# Altium PCB AtlasMCU_STM32_PCB.PcbDoc (part 1 of 2)
Units mm, origin at the board's own origin, x right, y up, seen from the top; angles counter-clockwise.
Board outline 53.5 x 39.5 mm, 4 copper layers (Top Layer, Int1 (GND), Int2 (PWR), Bottom Layer), stack 1.591 mm thick; 56 components, 56 nets, 263 pads, 118 vias.
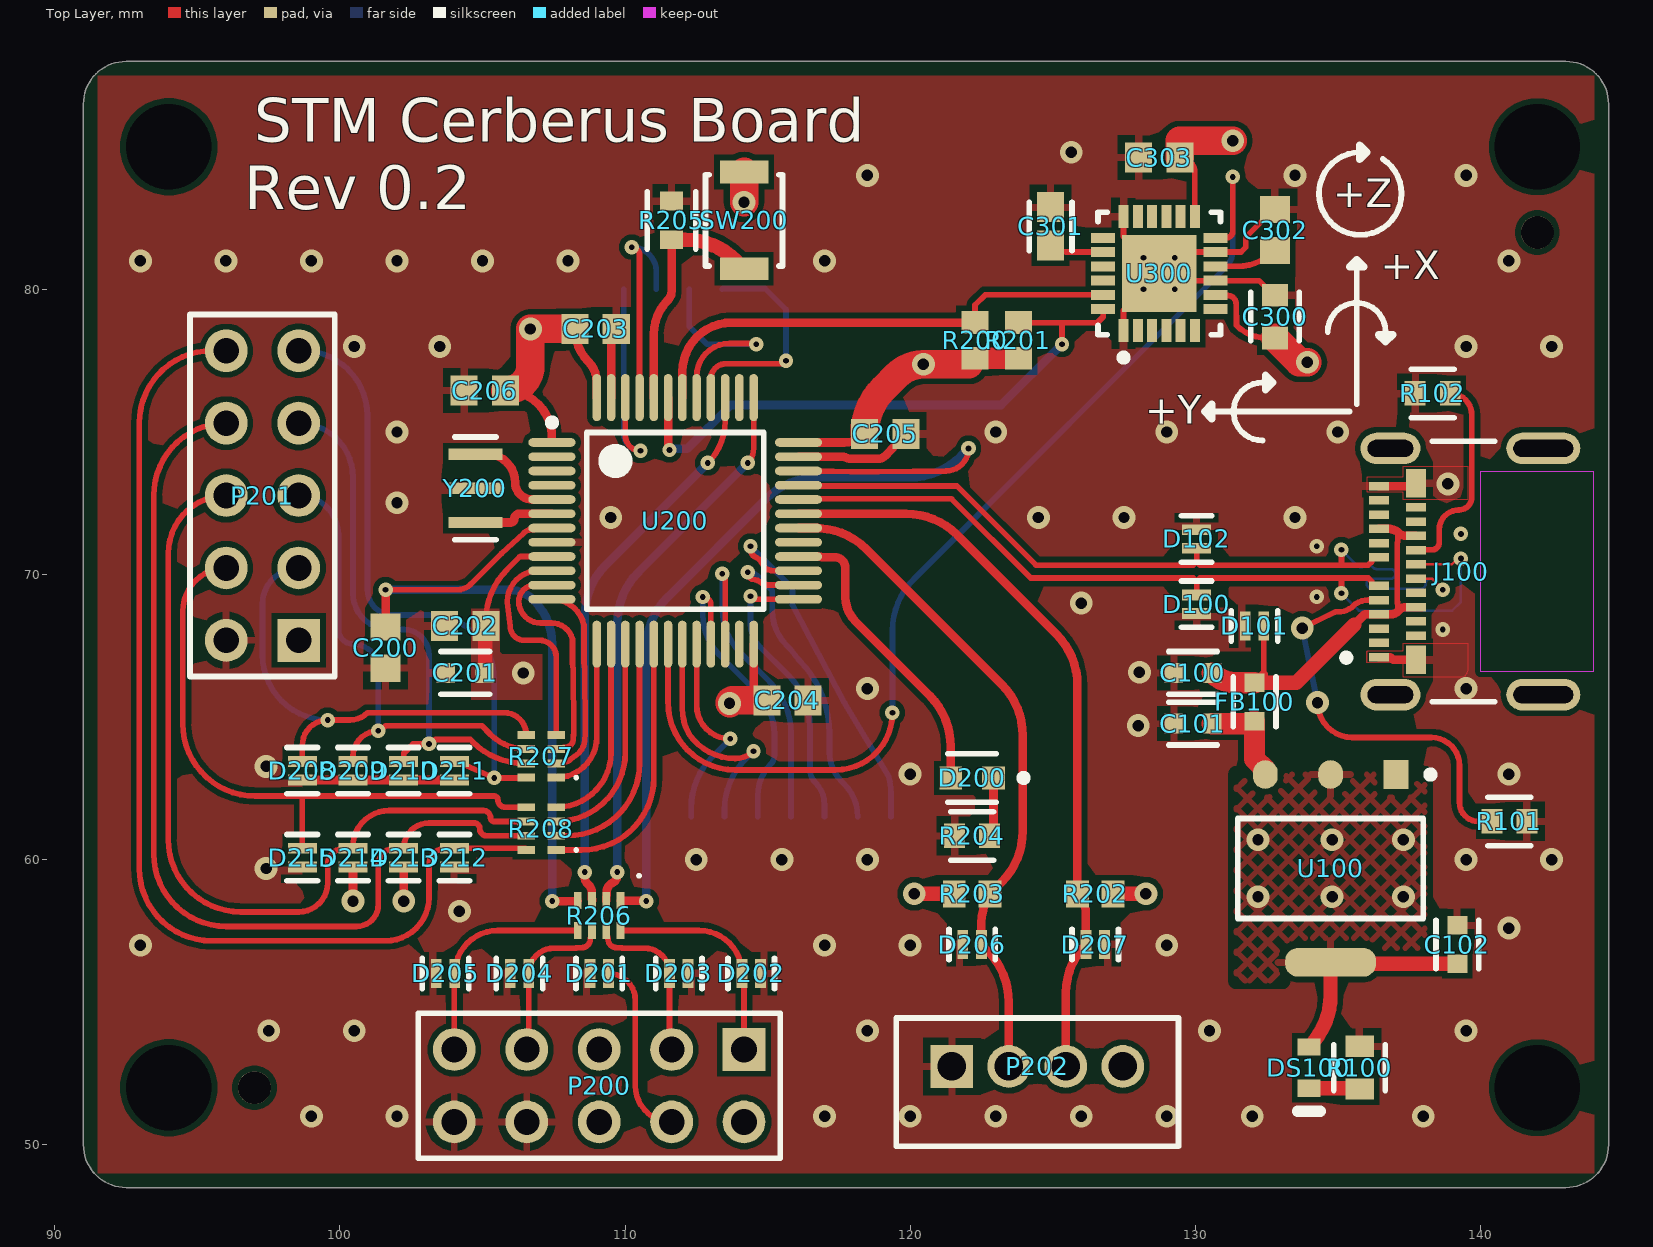
[diagram p0: Top Layer view]
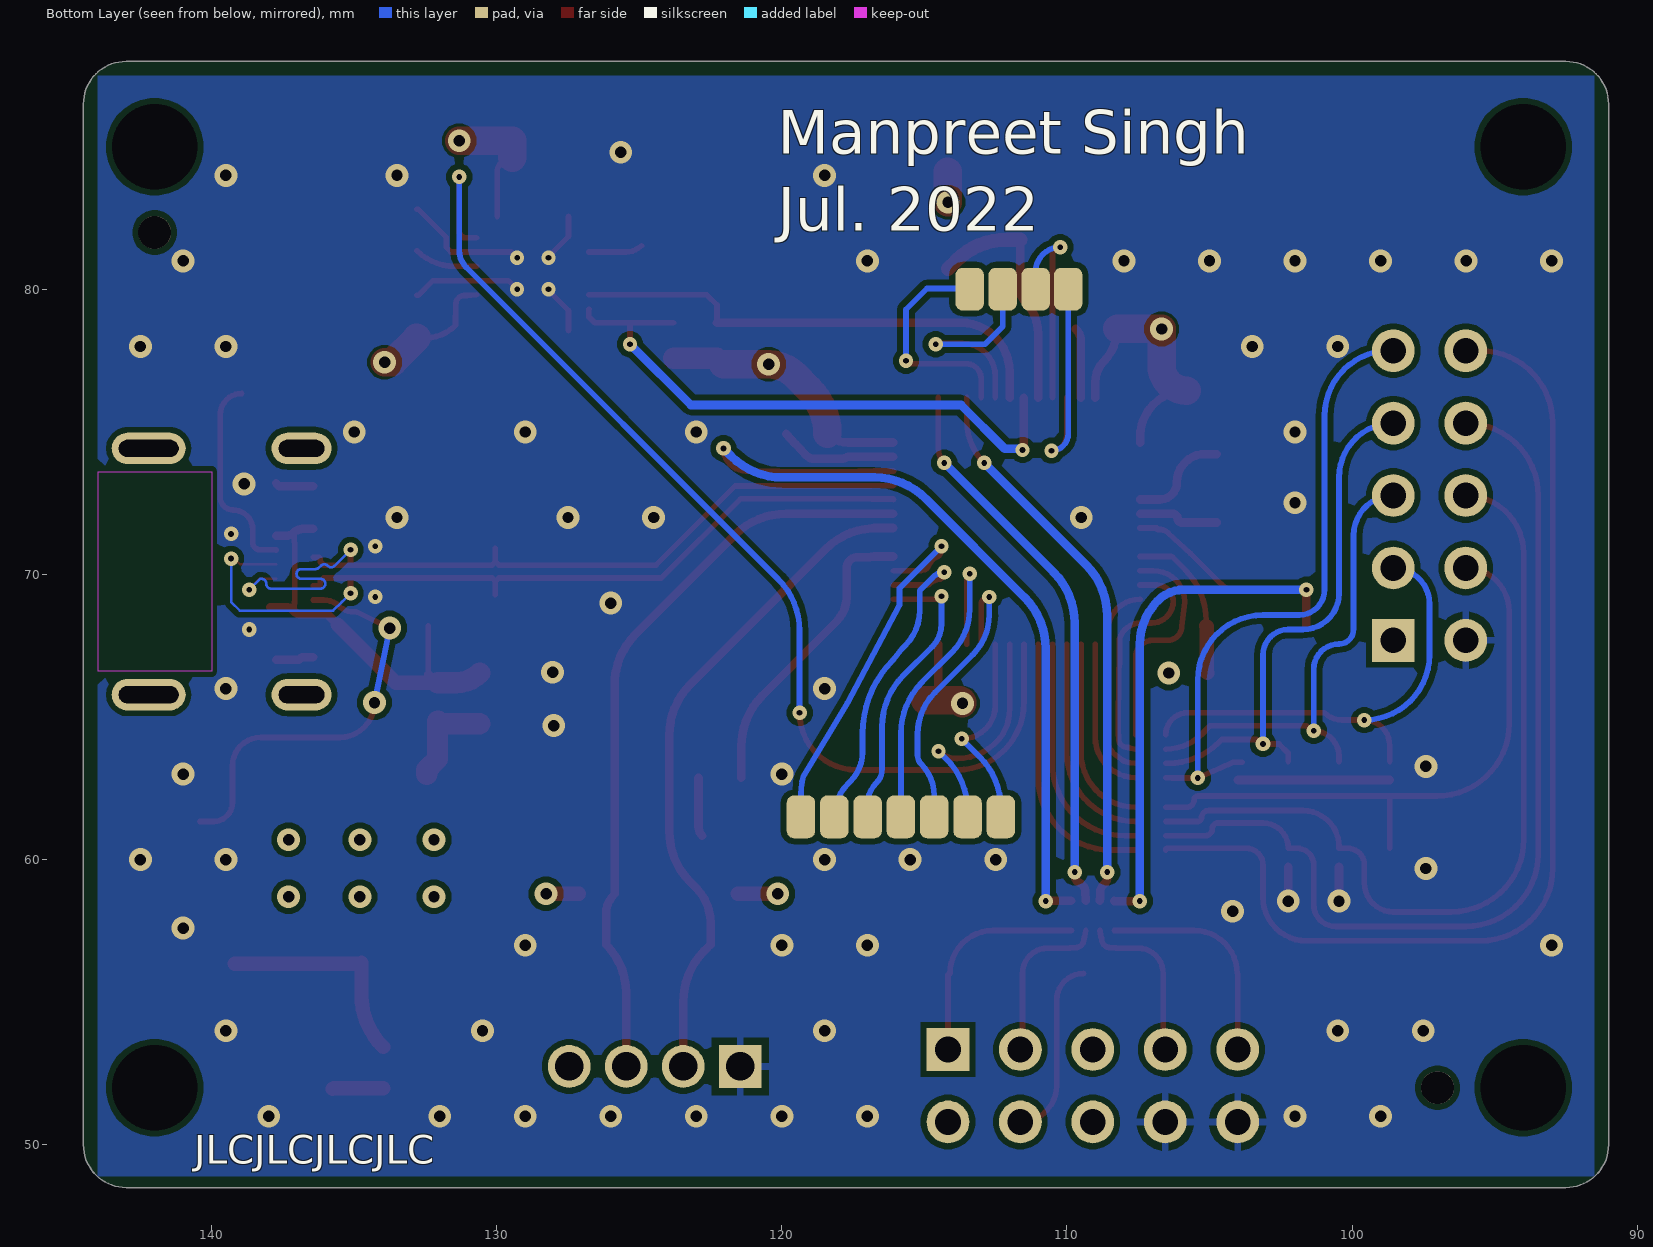
[diagram p1: Bottom Layer view, seen from below]
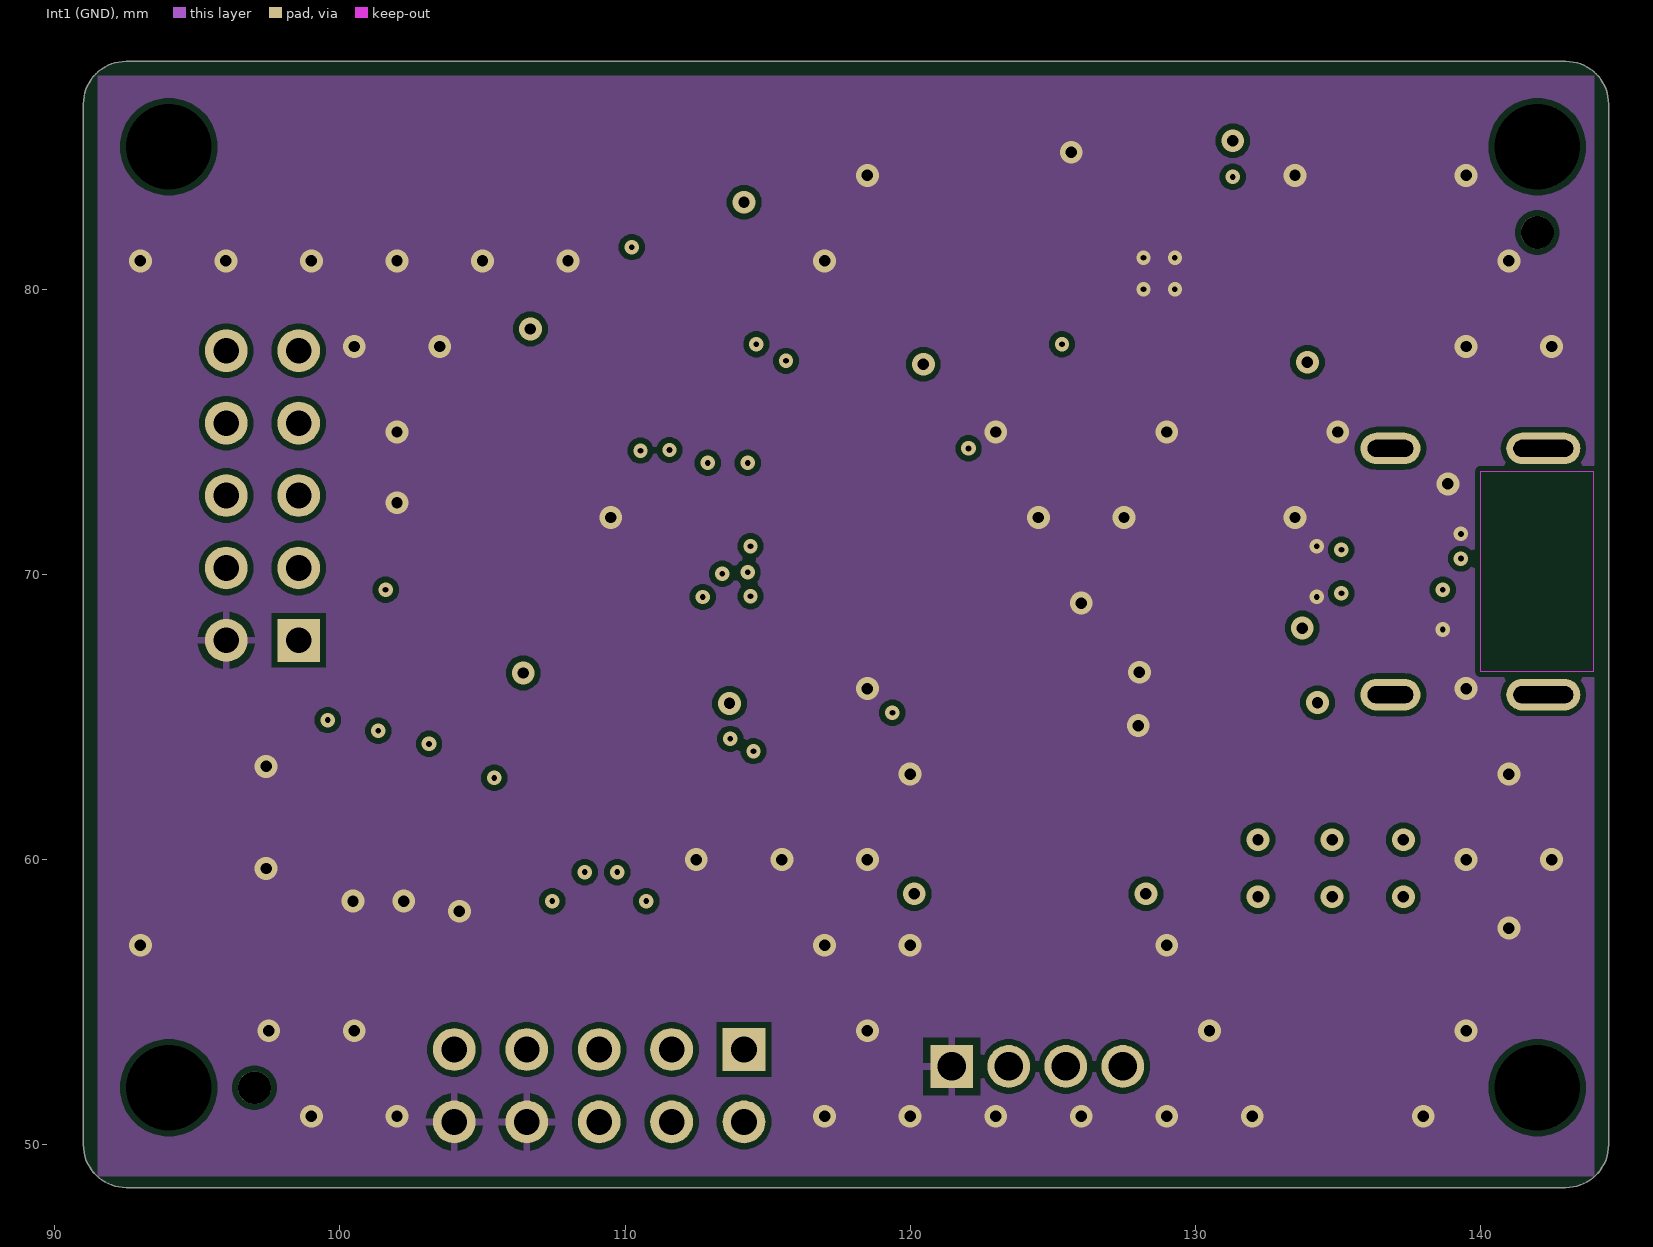
[diagram p2: Int1 (GND)]
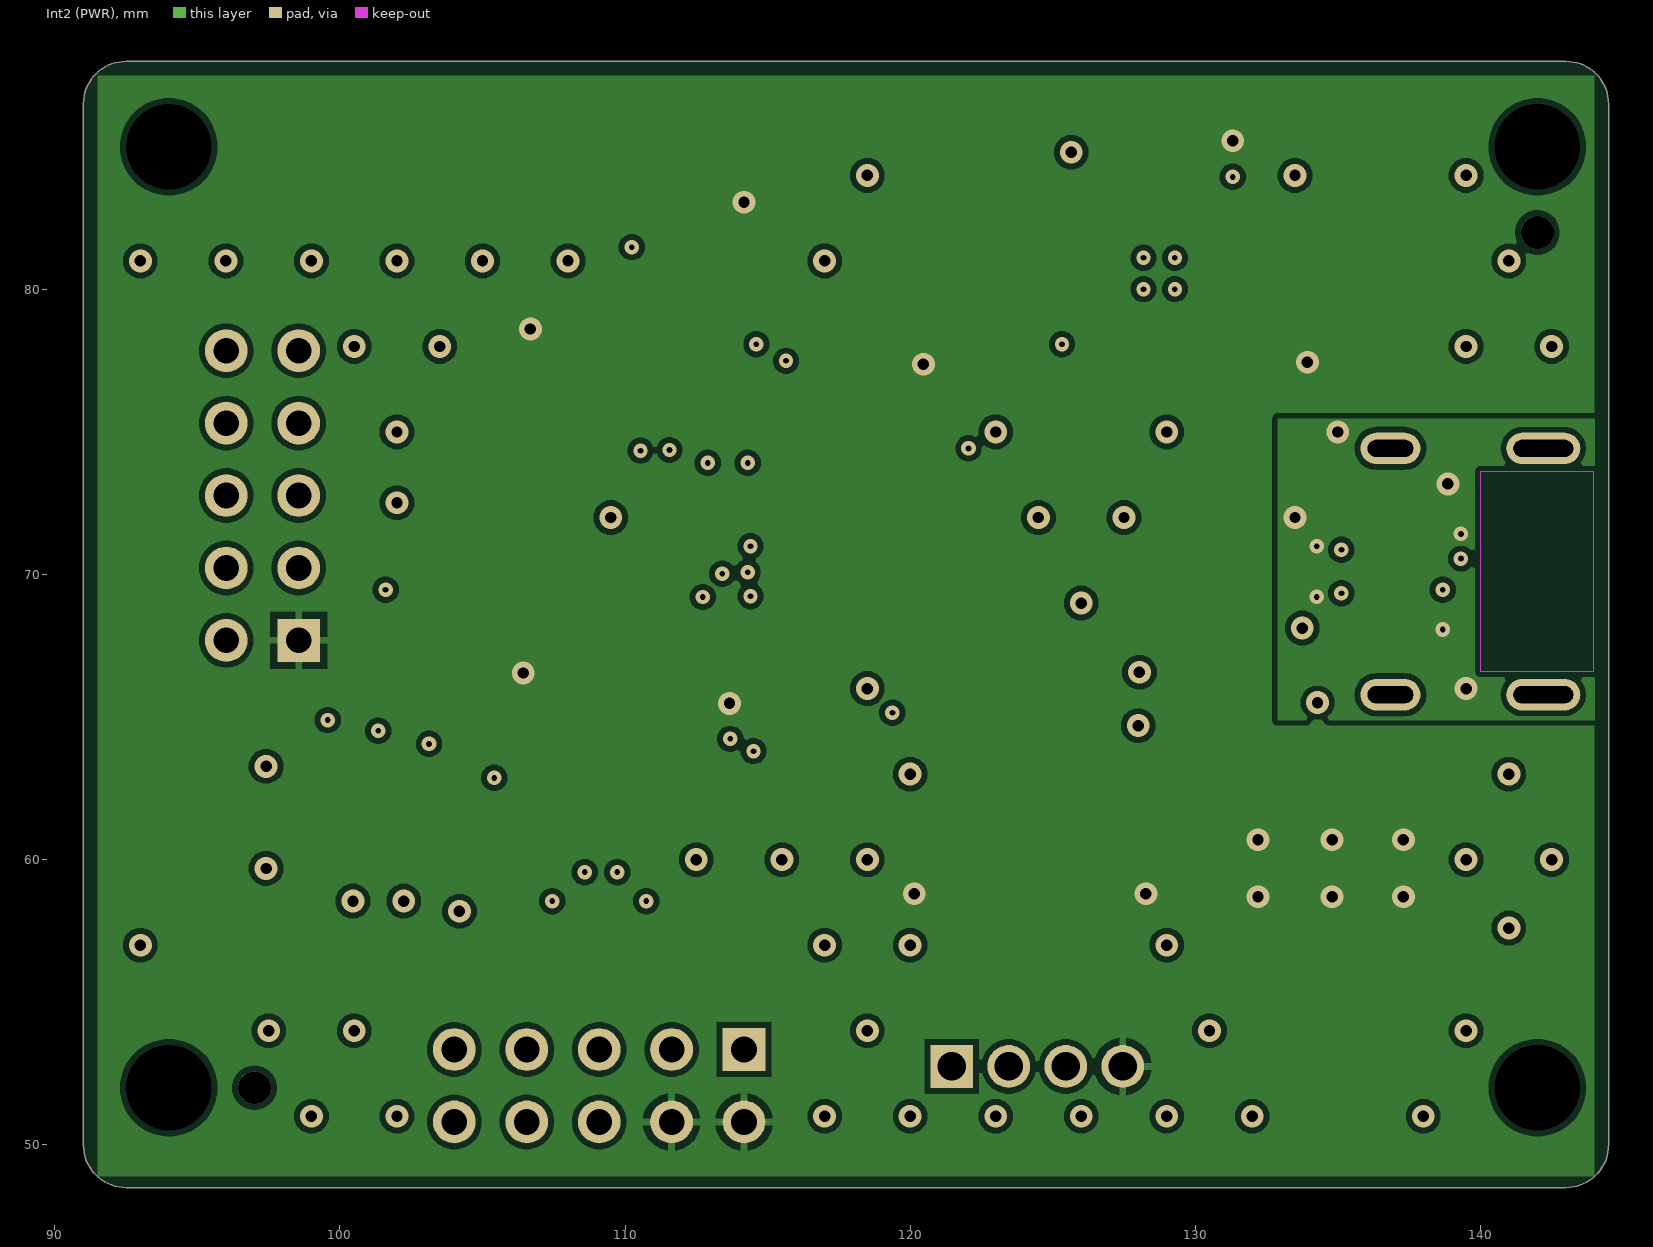
[diagram p3: Int2 (PWR)]

## Layer stack, top to bottom
Top Solder: solder mask 0.0254, SM-001, Dk 4
Top Layer: signal copper 0.035
Dielectric 1: prepreg 0.2104, PP-017, Dk 4.6
Int1 (GND): signal copper 0.0175
Dielectric 3: core 1.065, Core-039, Dk 4.6
Int2 (PWR): signal copper 0.0175
Dielectric 5: prepreg 0.2104, PP-017, Dk 4.6
Bottom Layer: signal copper 0.035
Bottom Solder: solder mask 0.0254, SM-001, Dk 4

## Board outline
91,50 91,86.5 cw(c92.5,86.5) 92.5,88 143,88 cw(c143,86.5) 144.5,86.5 144.5,50 cw(c143,50) 143,48.5 92.5,48.5 cw(c92.5,50)

## Design rules (kind name [scope] priority, off if disabled: settings)
Clearance [All] p1: gap=0.2 ignorepadtopadclearanceinfootprint=TRUE except(0.127: SMDPad-SMDPad; 0.254: Arc-Via Arc-Hole Track-Via Track-Hole; 0.33: Arc-THPad Track-THPad; 0.5: THPad-THPad)
DiffPairsRouting [All] p1: maxlimit=0.254 minlimit=0.254 mostfreqgap=0.254 toplayer_minwidth=0.089 toplayer_maxwidth=0.381 toplayer_prefwidth=0.381 midlayer1_minwidth=0.381 midlayer1_maxwidth=0.381 midlayer1_prefwidth=0.381 midlayer2_minwidth=0.381 midlayer2_maxwidth=0.381 midlayer2_prefwidth=0.381 bottomlayer_minwidth=0.089 bottomlayer_maxwidth=0.381 bottomlayer_prefwidth=0.381 maxuncoupledlength=12.7
HoleSize [All] p1: absolutevalues=TRUE maxlimit=6.3 minlimit=0.2 maxpercent=80.000 minpercent=20.000
HoleToHoleClearance [All] p1: gap=0.5 allowstackedmicrovias=TRUE
MatchedLengths "USB Length" [InDifferentialPair('USB_CONN_D')] p1: tolerance=0.254 checknetsindiffpair=TRUE checkdiffpairvsdiffpair=FALSE checkxsignals=FALSE checkothers=FALSE
MinimumAnnularRing [All] p1: minimumring=0.13
PlaneClearance [All] p1: clearance=0.127
PolygonConnect [All] p1: thpad.connectstyle=Relief thpad.reliefconductorwidth=0.254 thpad.reliefentries=4 thpad.polygonreliefangle="90 Angle" thpad.airgapwidth=0.254 smdpad.connectstyle=Relief smdpad.reliefconductorwidth=0.254 smdpad.reliefentries=4 smdpad.polygonreliefangle="90 Angle" smdpad.airgapwidth=0.254 via.connectstyle=Direct via.reliefconductorwidth=0.254 via.reliefentries=4 via.polygonreliefangle="90 Angle" via.airgapwidth=0.254
RoutingVias [All] p1: holewidth=0.711 width=1.27 viastyle="Through Hole" minholewidth=0.2 minwidth=0.4 maxholewidth=0.711 maxwidth=1.27
SolderMaskExpansion [All] p1: expansion=0.1 istentingtop=FALSE
UnRoutedNet [All] p1: checkbadconnections=TRUE
Width [All] p1: maxlimit=1 minlimit=0.089 preferedwidth=0.254 toplayer_prefwidth=0.2 midlayer1_minwidth=0.254 midlayer1_maxwidth=0.254 midlayer2_minwidth=0.254 midlayer2_maxwidth=0.254 bottomlayer_prefwidth=0.2 minimp=50.000000 maximp=50.000000 favimp=50.000000
25 further rules are at their usual default settings.

## Classes and differential pairs
component class MCU_Sensors: C300 C301 C302 C303 U300
component class MCU_Power: C100 C101 C102 D100 D101 D102 DS100 FB100 J100 R100 R101 R102 U100
component class AtlasMCU_STM32: C200 C201 C202 C203 C204 C205 C206 D200 D201 D202 D203 D204 D205 D206 D207 D208 D209 D210 D211 D212 D213 D214 D215 P200 P201 P202 R200 R201 R202 R203 R204 R205 R206 R207 R208 SW200 U200 Y200
differential pair USB_CONN_D: +USB_CONN_D_P -USB_CONN_D_N

## Components (designator, comment, footprint, x,y, rotation, side; value= is the part's Value field where it differs from the comment)
C100 "2u2" FP-GRM188-0_1-e0_2_0_5-MFG#1 129.921,66.548 r180 top
C101 "2u2" FP-GRM188-0_1-e0_2_0_5-MFG#1 129.921,64.77 r180 top
C102 "2u2" FP-GRM188-0_1-e0_2_0_5-MFG#1 139.192,57.023 r90 top
C200 "100n" CAPC1608X90X35ML10T15 101.6,67.437 r90 top
C201 "2u2" FP-GRM188-0_1-e0_2_0_5-MFG#1 104.394,66.548 r180 top
C202 "100n" CAPC1608X90X35ML10T15 104.394,68.199 r0 top
C203 "100n" CAPC1608X90X35ML10T15 108.966,78.613 r180 top
C204 "100n" CAPC1608X90X35ML10T15 115.697,65.583 r180 top
C205 "100n" CAPC1608X90X35ML10T15 119.126,74.93 r180 top
C206 "100n" CAPC1608X90X35ML10T15 105.08,76.454 r0 top
C300 "10n" FP-CC0603-DA-MFG 132.8,79.048 r90 top value="10 nF"
C301 "2u2" FP-GRM188-0_1-e0_2_0_5-MFG#2 124.926,82.211 r90 top
C302 "100n" CAPC1608X90X35ML10T15 132.8,82.084 r270 top
C303 "100n" CAPC1608X90X35ML10T15 128.736,84.624 r0 top
D100 "RCLAMP0521P-N" RCLAMP0521P-N 130.048,68.961 r90 top
D101 "RCLAMP0521P-N" RCLAMP0521P-N 132.08,68.199 r0 top
D102 "RCLAMP0521P-N" RCLAMP0521P-N 130.048,71.247 r270 top
D200 "LTST-C190GKT" FP-LTST-C190GKT-MFG 122.174,62.865 r180 top
D201 "RCLAMP0521P-N" RCLAMP0521P-N 109.093,56.007 r0 top
D202 "RCLAMP0521P-N" RCLAMP0521P-N 114.427,56.007 r180 top
D203 "RCLAMP0521P-N" RCLAMP0521P-N 111.887,56.007 r180 top
D204 "RCLAMP0521P-N" RCLAMP0521P-N 106.299,56.007 r0 top
D205 "RCLAMP0521P-N" RCLAMP0521P-N 103.703,56.007 r0 top
D206 "RCLAMP0521P-N" RCLAMP0521P-N 122.174,57.023 r0 top
D207 "RCLAMP0521P-N" RCLAMP0521P-N 126.492,57.023 r180 top
D208 "RCLAMP0521P-N" RCLAMP0521P-N 98.679,63.119 r90 top
D209 "RCLAMP0521P-N" RCLAMP0521P-N 100.457,63.119 r90 top
D210 "RCLAMP0521P-N" RCLAMP0521P-N 102.235,63.119 r90 top
D211 "RCLAMP0521P-N" RCLAMP0521P-N 104.013,63.119 r90 top
D212 "RCLAMP0521P-N" RCLAMP0521P-N 104.013,60.071 r90 top
D213 "RCLAMP0521P-N" RCLAMP0521P-N 102.235,60.071 r90 top
D214 "RCLAMP0521P-N" RCLAMP0521P-N 100.457,60.071 r90 top
D215 "RCLAMP0521P-N" RCLAMP0521P-N 98.679,60.071 r90 top
DS100 "RED LED" VISH-TLMX1100_V 133.985,52.705 r270 top
FB100 "100R" FP-BLM18-0_15-t0_5-MFG 132.08,65.532 r270 top
J100 "1054500101" FP-1054500101-MFG 140.208,70.104 r90 top
P200 "Header 5X2" HDR2X5 114.173,53.34 r180 top
P201 "Header 5X2" HDR2X5 98.552,67.691 r90 top
P202 "B4B-PH-K-S(LF)(SN)" JST-B4B-PH-K-S_V 124.46,52.197 r0 top
R100 "1K" FP-CRCW0603-e3-MFG 135.763,52.705 r90 top
R101 "5K1" FP-CRCW0603-e3-IPC_C 141.021,61.341 r0 top
R102 "5K1" FP-CRCW0603-e3-IPC_C 138.328,76.352 r180 top
R200 "2K2" RESC1609X50X30NL10T20 122.276,78.213 r270 top
R201 "2K2" RESC1609X50X30NL10T20 123.8,78.213 r270 top
R202 "2K2" RESC1609X50X30NL10T20 126.492,58.801 r0 top
R203 "2K2" RESC1609X50X30NL10T20 122.174,58.801 r180 top
R204 "CRCW06031K00JNEA" FP-CRCW0603-e3-IPC_C 122.174,60.833 r180 top
R205 "RC0603FR-0710KL" FP-RC0603-0_55-IPC_C 111.633,82.423 r270 top
R206 "CAT10-220J4LF" BOUR-CAT10_V 109.093,58.039 r270 top
R207 "CAT10-220J4LF" BOUR-CAT10_V 107.061,63.627 r180 top
R208 "CAT10-220J4LF" BOUR-CAT10_V 107.061,61.087 r180 top
SW200 "B3U-1000P" FP-B3U-1000P-MFG 114.173,82.423 r90 top
U100 "AMS1117-3.3" FP-AMS1117-IPC_C 134.747,59.69 r270 top
U200 "STM32F302C8T6" STM-LQFP48_M 111.76,71.882 r0 top
U300 "MPU-6050" IS-QFN-24_V 128.736,80.56 r90 top
Y200 "CSTNE16M0V530000R0" FP-CSTNE16M0V530000R0-MFG 104.75,73.025 r270 top

## Footprints (in the part's own frame and the unit in brackets; to place one, negate y for a bottom-side part, rotate by r counter-clockwise, add the part's x,y. Pads: shape width x height; smd on the part's side, far side on the other; paste and mask are expansions set on the pad)
BOUR-CAT10_V [mm] "SMD, 8-Leads, Body 2x1mm, Pitch 0.5mm"
  rect 0.6x0.275 smd: 1(-0.525,0.75) 2(-0.525,0.25) 3(-0.525,-0.25) 4(-0.525,-0.75) 5(0.525,-0.75) 6(0.525,-0.25) 7(0.525,0.25) 8(0.525,0.75)
  silkscreen extent -1.45,1.35 -1.35,1.45, body extent -0.5,-1 0.5,1, height 0.38
CAPC1608X90X35ML10T15 [mm] "Chip Capacitor, 2-Leads, Body 1.7x0.9mm, IPC Low Density"
  rect 0.95x1.05 smd: 1(-0.725,0) 2(0.725,0)
  body extent -0.85,-0.45 0.85,0.45, height 0.9
FP-1054500101-MFG [mm]
  rrect100% 1.1x2.1 hole 1.6 slot 0.6 at 0 deg paste-1000 mask+0: 1(-4.32,3.36) 2(4.32,3.36)
  rrect100% 1.1x2.6 hole 2.1 slot 0.6 at 0 deg paste-1000 mask+0: 3(-4.32,-2) 4(4.32,-2)
  rect 0.3x0.7 smd paste+0 mask+0: A1(-3,3.77) A2(-2.5,3.77) A3(-2,3.77) A4(-1.5,3.77) A5(-1,3.77) A6(-0.5,3.77) A7(0.5,3.77) A8(1,3.77) A9(1.5,3.77) A10(2,3.77) A11(2.5,3.77) A12(3,3.77) B2(2.25,2.47) B3(1.75,2.47) B4(1.25,2.47) B5(0.75,2.47) B6(0.25,2.47) B7(-0.25,2.47) B8(-0.75,2.47) B9(-1.25,2.47) B10(-1.75,2.47) B11(-2.25,2.47)
  rect 1x0.7 smd paste+0 mask+0: B1(3.1,2.47) B12(-3.1,2.47)
  Keep-Out Layer region: -3.5,-3.77 3.5,-3.77 3.5,0.203 -3.5,0.203
  silkscreen extent -4.57,-0.3 4.57,5.03
FP-AMS1117-IPC_C [mm]
  rect 1.004x0.872 smd paste+0 mask+0: 1(-3.295,2.29)
  rrect100% 1.004x0.872 smd paste+0 mask+0: 2(-3.295,0) 3(-3.295,-2.29)
  rrect87% 1.004x3.182 smd paste+0 mask+0: 4(3.295,0)
  silkscreen extent -3.42,-3.25 1.75,3.63, body extent -3.9,-3.35 3.9,3.35, height 0.25
FP-B3U-1000P-MFG [mm]
  rect 0.8x1.7 smd paste+0 mask+0: 1(-1.7,0) 2(1.7,0)
  silkscreen extent -1.6,-1.35 1.6,1.35, body extent -2.2,-1.45 2.2,1.45, height 0.25
FP-BLM18-0_15-t0_5-MFG [mm]
  rect 0.65x0.7 smd paste+0 mask+0: 1(-0.675,0) 2(0.675,0)
  silkscreen extent -0.87,-0.75 0.87,0.75, body extent -1.1,-0.58 1.1,0.58, height 0.25
FP-CC0603-DA-MFG [mm]
  rect 0.8x0.9 smd paste+0 mask+0: 1(-0.75,0) 2(0.75,0)
  silkscreen extent -0.85,-0.85 0.85,0.85, body extent -1.35,-0.75 1.35,0.75, height 0.25
FP-CRCW0603-e3-IPC_C [mm]
  rect 0.735x0.862 smd paste+0 mask+0: 1(-0.615,0) 2(0.615,0)
  silkscreen extent -0.75,-0.85 0.75,0.85, body extent -1.08,-0.58 1.08,0.58, height 0.25
FP-CRCW0603-e3-MFG [mm]
  rect 0.75x1 smd paste+0 mask+0: 1(-0.75,0) 2(0.75,0)
  silkscreen extent -0.8,-0.9 0.8,0.9, body extent -1.22,-0.6 1.22,0.6, height 0.25
FP-CSTNE16M0V530000R0-MFG [mm]
  rect 0.4x1.9 smd paste+0 mask+0: 1(1.2,0) 2(0,0) 3(-1.2,0)
  silkscreen extent -1.8,-0.72 1.8,0.72, body extent -1.78,-1.05 1.78,1.05, height 0.25
FP-GRM188-0_1-e0_2_0_5-MFG#1 [mm]
  rect 0.65x0.7 smd paste+0 mask+0: 1(-0.675,0) 2(0.675,0)
  silkscreen extent -0.85,-0.75 0.85,0.75, body extent -1.1,-0.55 1.1,0.55, height 0.25
FP-GRM188-0_1-e0_2_0_5-MFG#2 [mm]
  rect 1.05x0.95 smd paste+0 mask+0: 1(-0.675,0) 2(0.675,0)
  silkscreen extent -0.85,-0.75 0.85,0.75, body extent -1.1,-0.55 1.1,0.55, height 0.25
FP-LTST-C190GKT-MFG [mm]
  rect 0.8x0.8 smd paste+0 mask+0: 1(-0.75,0) 2(0.75,0)
  silkscreen extent -1.92,-0.85 0.85,0.85, body extent -1.25,-0.55 1.25,0.55, height 0.25
FP-RC0603-0_55-IPC_C [mm]
  rect 0.659x0.812 smd paste+0 mask+0: 1(-0.677,0) 2(0.677,0)
  silkscreen extent -1.01,-0.85 1.01,0.85, body extent -1.11,-0.55 1.11,0.55, height 0.25
HDR2X5 [mm] "Connector; Header; 5x2 Position"
  rect 1.5x1.5 hole 0.9: 1(0,0)
  round 1.5 hole 0.9: 2(0,2.54) 3(2.54,0) 4(2.54,2.54) 5(5.08,0) 6(5.08,2.54) 7(7.62,0) 8(7.62,2.54) 9(10.16,0) 10(10.16,2.54)
  silkscreen extent -1.27,-1.27 11.43,3.81
IS-QFN-24_V [mm] "QFN, 24-Leads, Body 4x4mm, Pitch 0.5mm, Thermal Pad 2.7x2.6mm"
  rect 0.8x0.35 smd: 1(-2,1.25) 2(-2,0.75) 3(-2,0.25) 4(-2,-0.25) 5(-2,-0.75) 6(-2,-1.25) 13(2,-1.25) 14(2,-0.75) 15(2,-0.25) 16(2,0.25) 17(2,0.75) 18(2,1.25)
  rect 0.35x0.85 smd mask+0.102: 7(-1.25,-1.975) 8(-0.75,-1.975) 9(-0.25,-1.975) 10(0.25,-1.975) 11(0.75,-1.975) 12(1.25,-1.975) 19(1.25,1.975) 20(0.75,1.975) 21(0.25,1.975) 22(-0.25,1.975) 23(-0.75,1.975) 24(-1.25,1.975)
  rect 2.7x2.6 smd: 25(0,0)
  silkscreen extent -3.07,-2.15 2.15,2.15, body extent -2,-2 2,2, height 0.95
JST-B4B-PH-K-S_V [mm] "Connector, 4-Leads, Body 9.9x4.5mm, Pitch 2mm"
  rect 1.5x1.5 hole 1: 1(-3,0.55)
  round 1.5 hole 1: 2(-1,0.55) 3(1,0.55) 4(3,0.55)
  silkscreen extent -4.95,-2.25 4.95,2.25, body extent -4.95,-2.25 4.95,2.25, height 6
RCLAMP0521P-N [mm]
  rect 0.377x1.016 smd: 1(-0.325,0) 2(0.325,0)
  silkscreen extent -0.81,-0.53 0.81,0.53
RESC1609X50X30NL10T20 [mm] "Chip Resistor, 2-Leads, Body 1.55x0.85mm, IPC Medium Density"
  rect 0.8x0.95 smd: 1(-0.625,0) 2(0.625,0)
  body extent -0.82,-0.48 0.82,0.48, height 0.5
STM-LQFP48_M [mm] "QFP, 48-Leads, Body 7x7mm, Pitch 0.5mm, IPC Low Density"
  oval 1.65x0.3 smd: 1(-4.325,2.75) 2(-4.325,2.25) 3(-4.325,1.75) 4(-4.325,1.25) 5(-4.325,0.75) 6(-4.325,0.25) 7(-4.325,-0.25) 8(-4.325,-0.75) 9(-4.325,-1.25) 10(-4.325,-1.75) 11(-4.325,-2.25) 12(-4.325,-2.75) 25(4.325,-2.75) 26(4.325,-2.25) 27(4.325,-1.75) 28(4.325,-1.25) 29(4.325,-0.75) 30(4.325,-0.25) 31(4.325,0.25) 32(4.325,0.75) 33(4.325,1.25) 34(4.325,1.75) 35(4.325,2.25) 36(4.325,2.75)
  oval 0.3x1.65 smd: 13(-2.75,-4.325) 14(-2.25,-4.325) 15(-1.75,-4.325) 16(-1.25,-4.325) 17(-0.75,-4.325) 18(-0.25,-4.325) 19(0.25,-4.325) 20(0.75,-4.325) 21(1.25,-4.325) 22(1.75,-4.325) 23(2.25,-4.325) 24(2.75,-4.325) 37(2.75,4.325) 38(2.25,4.325) 39(1.75,4.325) 40(1.25,4.325) 41(0.75,4.325) 42(0.25,4.325) 43(-0.25,4.325) 44(-0.75,4.325) 45(-1.25,4.325) 46(-1.75,4.325) 47(-2.25,4.325) 48(-2.75,4.325)
  silkscreen extent -4.45,-3.1 3.1,3.57, body extent -3.5,-3.5 3.5,3.5, height 1.6
VISH-TLMX1100_V [mm] "SMD, 2-Leads, Body 1.6x0.8mm"
  rect 0.6x0.8 smd: 1(-0.725,0) 2(0.725,0)
  silkscreen extent 1.53,-0.4 1.53,0.4, body extent -0.8,-0.4 0.8,0.4, height 0.65

## Part data
C100 C101 C102 C201 C301: library part CMP-2006-02836-2, "Chip Multilayer Ceramic Capacitors for General Purpose, 0603, 2.2uF, X7R, 15%, 10%, 10V", Capacitance=2.2uF, Case Code (Imperial)=0603, Case Code (Metric)=1608, Dielectric=X7R, Max Operating Temperature=125°C, Min Operating Temperature=-55°C, Package Quantity=1, Tolerance=10%, Voltage=10V, Case/Package=0603, Depth=0.8mm, Height=0.8mm, Lead Free="Lead Free", Length=1.6mm, Material=Ceramic, Mount="Surface Mount", Number of Pins=2, Packaging="Cut Tape", REACH SVHC="No SVHC", Termination=SMD/SMT, Thickness=0.035inch, Voltage Rating=10V, Voltage Rating (DC)=10V, Weight=7.1E-05oz, Width=0.031inch
C200 C202 C203 C204 C205 C206 C302 C303: library part CMP-2100-03643-1, "Chip Capacitor, 0.1 uF, +/- 10%, 50 V, -55 to 125 degC, 0603 (1608 Metric), RoHS, Tape and Reel", Capacitance=100nF, Case Code (Imperial)=0603, Case Code (Metric)=1608, Dielectric=X7R, Dielectric Material=Ceramic, Insulation Resistance=10GR, Manufacturer=Murata, Max Operating Temperature=125degC, Min Operating Temperature=-55degC, Package Description="2-Pin Surface Mount Device, Body 1.6 x 0.8 mm", Package Quantity=1, Tolerance=10%, Voltage=50V, Case/Package=0603, Contact Plating=Tin, Datasheet URL=http://psearch.en.murata.com/capacitor/product/GRM188R71H104KA93%23.pdf, Datasheet Version=42675.0, Depth=0.8mm, Height=0.8mm, Lead Free=LeadFree, Length=1.6mm, Manufacturer URL=http://www.murata.com/, Material=Ceramic, Mount=SurfaceMount, Number of Pins=2, Package Reference=0603, Packaging=TapeandReel, Radiation Hardening=No, REACH SVHC=NoSVHC, RoHSCompliant=true, Termination=SMD/SMT, Thickness=0.035inch, Voltage Rating=50V, Voltage Rating (DC)=50V, Width=0.8mm
C300: library part CMP-2100-03600-2, "CAP CER 10000PF 50V X7R 0603", Capacitance="10 nF", Manufacturer=YAGEO, Manufacturer Part Number=CC0603KRX7R9BB103, Package=CC0603-DA, Temperature="-55°C to +125°C", Temperature Characteristic=X7R, Temperature Coefficient=15%, Temperature Range High=+125°C, Temperature Range Low=-55°C, Tolerance=0.1, Voltage="50 V", Automotive=No, Category=Cap, ComponentLink2Description=Datasheet, ComponentLink2URL=http://www.yageo.com/documents/recent/UPY-GPHC_X7R_6.3V-to-50V_18.pdf, Device Class L1="Passive Components", Device Class L2=Capacitors, Device Class L3="Ceramic Capacitors", Digikey Description="CAP CER 10000PF 50V X7R 0603", Footprint Url=http://www.yageo.com/exep/pages/download/literatures/UPY-C_GEN_24.pdf, Height=0.9mm, Lead Free=Yes, Material=Ceramic, Mouser Description="Multilayer Ceramic Capacitor, CC Series, 0.01 - F, - 10%, X7R, 50 V, 0603 [1608 Metric]", Octopart=https://octopart.com/cc0603krx7r9bb103-yageo-192938, RoHS=TRUE, Voltage Rating="50 V"
D200: library part CMP-22017-000005-2, "LED GREEN CLEAR CHIP SMD", Case Code (Imperial)=0603, Case Code (Metric)=1608, Color=Green, Forward Current=30mA, Forward Voltage=2.1V, Lens Color=Colorless, Max Operating Temperature=85°C, Min Operating Temperature=-55°C, Package Quantity=1, Power Dissipation=100mW, Reverse Voltage=5V, Test Current=10mA, Voltage=2V, Case/Package=0603, Depth=0.8mm, Dominant Wavelength=569nm, Height=0.8mm, Illumination Color=Green, Lead Free="Lead Free", Length=1.6mm, Lens Style=Clear, Lens Transparency=Clear, Luminous Intensity=6mcd, Mount="Surface Mount", Number of Elements=1, Number of LEDs=1, Number of Pins=2, Packaging="Tape and Reel", Power Rating=100mW, Radiation Hardening=No, Viewing Angle=130°, Wavelength=565nm, Width=0.8mm
DS100: library part CMP-1666-00027-1, "LED, RED, 2.1 V, -40 to 100 degC, 2-Pin SMD (0603), RoHS, Tape and Reel", Capacitance="12 pF", Case Code (Imperial)=0603, Case Code (Metric)=1608, Max Operating Temperature=125degC, Min Operating Temperature=-55degC, Package Quantity=4000, Resistance="100000000000 Ohm", Tolerance=5%, Type (Capacitors)=C0G, Voltage Rating="50 V", Case/Package=0603, ComponentLink1Description="Manufacturer URL", ComponentLink1URL=http://www.vishay.com/, ComponentLink2Description=Datasheet, ComponentLink2URL=http://www.vishay.com/docs/83173/tlmb1100.pdf, DatasheetVersion="Rev. 2.7, 03/2016", Height="0.8 mm", Length="1.6 mm", Mount="Surface Mount", PackageDescription="2-Pin Surface Mount Device, Body 1.6 x 0.8 mm", PackageReference=TLMX1100, Packaging="Tape and Reel", Pins=2, Radiation Hardening=No, REACH SVHC="No SVHC", RoHSCompliant=True, Voltage Rating (DC)="50 V", Width="0.8 mm"
FB100: library part CMP-0686-00530-3, "Chip Ferrite Bead, 0603, 100Ω @ 100MHz, 25%, 0.045Ω, 2A", Case Code (Imperial)=0603, Case Code (Metric)=1608, Current Rating=2A, DC Resistance (DCR)=45mR, Max Operating Temperature=125°C, Min Operating Temperature=-55°C, Package Quantity=1, Test Frequency=100MHz, Tolerance=25%, Case/Package=0603, Contact Plating=Tin, Core Material=Ferrite, Depth=0.8mm, Height=0.8mm, Impedance=100R, Lead Free="Lead Free", Length=1.6mm, Material=Ferrite, Max Current Rating=2A, Max DC Current=2A, Number of Circuits=1, Number of Lines=1, Number of Pins=2, Packaging="Tape and Reel", REACH SVHC="No SVHC", Termination=SMD/SMT, Width=0.8mm
J100: library part CMP-04767-000004-1, "CONN RCP USB3.1 TYPEC 24P SMD RA", Current Rating=0.25/1.25/5A, Manufacturer=Molex, Package=0, Temperature="-30°C to +85°C", Temperature Range High=+85°C, Temperature Range Low=-30°C, Voltage Rating=30V, Automotive=No, Category=Conn, ComponentLink2Description=Datasheet, ComponentLink2URL=https://www.molex.com/webdocs/datasheets/pdf/en-us/1054500101_IO_CONNECTORS.pdf, Conn Orientation="Right Angle", Contact Material=Gold,Nickel, Device Class L1=Connectors, Device Class L2="USB Connectors", Device Class L3=unset, Digikey Description="CONN RCP USB3.1 TYPEC 24P SMD RA", Footprint Url=https://www.molex.com/pdm_docs/sd/1054500101_sd.pdf, Height=3.44mm, Is Female=yes, Lead Free=Yes, Manufacturer Part Number=1054500101, Mouser Description="USB Shielded I/O Receptacle; Type C; Right Angle; Surface Mount; Gold over Nickel", Number Of Contacts=24, Octopart=https://octopart.com/105450-0101-molex-68082325, Pitch=0.5mm, RoHS=TRUE, Shielding=true, Usb Standard="USB 3.1"
P200 P201: "Header, 5-Pin, Dual row", LatestRevisionDate=17-Jul-2002, LatestRevisionNote="Re-released for DXP Platform.", Publisher="Altium Limited"
P202: library part CMP-2000-05165-1, "Male Header, Pitch 2 mm, 1 x 4 Position, Height 6 mm, Tail Length 3.4 mm, -25 to 85 degC, RoHS, Bulk", Manufacturer=JST, Datasheet URL=http://datasheet.octopart.com/B4B-PH-K-S%28LF%29%28SN%29-JST-datasheet-10558886.pdf, Datasheet Version=Apr-09, Manufacturer URL=http://www.jst.com/home2.html, No of Positions=4, Pitch=2mm, Style/Orientation=StraightHeader/Plug, Termination=Crimp, Type=ShroudedHeader
R100: library part CMP-1666-00003-5, "RES Thick Film, 1kΩ, 1%, 0.1W, 100ppm/°C, 0603", Case Code (Imperial)=0603, Case Code (Metric)=1608, Max Operating Temperature=155°C, Max Power Dissipation=100mW, Min Operating Temperature=-55°C, Package Quantity=10, Resistance=1kR, Temperature Coefficient=100ppm/°C, Tolerance=1%, Voltage Rating=75V, Case/Package=0603, Composition="Thick Film", Contact Plating=Tin, Depth=0.85mm, Features="Automotive AEC-Q200", Height=0.45mm, Lead Free="Lead Free", Length=1.55mm, Military Standard=Not, Mount="Surface Mount", Number of Pins=2, Number of Terminations=2, Packaging="Tape and Reel", Power Rating=100mW, Radiation Hardening=No, Termination=SMD/SMT, Voltage Rating (DC)=75V, Weight=7.1E-05oz, Width=0.033inch
R101 R102: library part CMP-1012-00590-3, "RES Thick Film, 5.1kΩ, 1%, 0.1W, 100ppm/°C, 0603", Case Code (Imperial)=0603, Case Code (Metric)=1608, Max Operating Temperature=155°C, Min Operating Temperature=-55°C, Package Quantity=5000, Power Rating=100mW, Resistance=5.1kR, Temperature Coefficient=100ppm/°C, Tolerance=1%, Voltage Rating=75V, Case/Package=0603, Composition="Thick Film", Contact Plating=Tin, Depth=0.85mm, Height=0.45mm, Lead Free="Lead Free", Length=1.55mm, Military Standard=Not, Mount="Surface Mount", Packaging="Tape and Reel", Radiation Hardening=No, Termination=SMD/SMT, Voltage Rating (DC)=75V, Weight=7.1E-05oz, Width=0.85mm
R200 R201 R202 R203: library part CMP-2000-03167-1, "CRCW06032K20FKEA", Manufacturer="Vishay Dale", Part Number=CRCW06032K20FKEA
R204: library part CMP-02407-007100-1, "RES Thick Film, 1kΩ, 5%, 0.1W, 200ppm/°C, 0603", Case Code (Imperial)=0603, Case Code (Metric)=1608, Max Operating Temperature=155°C, Max Power Dissipation=100mW, Min Operating Temperature=-55°C, Package Quantity=1, Resistance=1kR, Temperature Coefficient=200ppm/°C, Tolerance=5%, Voltage Rating=75V, Case/Package=0603, Composition="Thick Film", Contact Plating=Tin, Depth=0.85mm, Features="Automotive AEC-Q200", Height=0.02inch, Lead Free="Lead Free", Length=1.55mm, Military Standard=Not, Number of Pins=2, Number of Terminations=2, Packaging="Tape and Reel", Power Rating=100mW, Radiation Hardening=No, Termination=SMD/SMT, Voltage Rating (DC)=75V, Weight=7.1E-05oz, Width=0.033inch
R205: library part CMP-2100-03664-2, "RES 10K OHM 1% 1/10W 0603", Case Code (Imperial)=0603, Case Code (Metric)=1608, Max Operating Temperature=155°C, Max Power Dissipation=100mW, Min Operating Temperature=-55°C, Resistance=10kR, Resistance Tolerance=1%, Resistor Type="Thick Film", Temperature Coefficient=100ppm/°C, Voltage Rating=75V, Voltage Rating (DC)=50V, Case/Package=0603, Construction=Rectangular, Depth=0.8mm, Features="Moisture Resistant", Height=0.45mm, Lead Free="Lead Free", Lead Pitch=0.3mm, Length=1.6mm, Military Standard=Not, Number of Pins=2, Number of Terminations=2, Packaging="Tape and Reel", Power Rating=100mW, RoHS Compliant=Yes, Series=RC, Size Code=0603, Termination=SMD/SMT, Tolerance=1%, Weight=7.1E-05oz, Width=0.8mm
R206 R207 R208: library part CMP-2000-06066-1, "Chip Resistor Array, 22 Ohm, +/- 5%, -55 to 125 degC, 8-Pin SMD, RoHS, Tape and Reel", Manufacturer=Bourns, Number of Resistors=4, Package Description="8-Pin Surface Mount Device, Body 2 x 1 mm, Pitch 0.5 mm", Package Reference=CAT10, Package Type=SMT, Power, Rating=0.125W, Resistance=22Ohms, Temperature, Coefficent=±250, Temperature, Operating=-55to+125°C, Tolerance=±5%, Brand/Series=CAT10Series, Circuit=IsolatedArray, Datasheet URL=http://www.bourns.com/docs/Product-Datasheets/CAT10.pdf, Datasheet Version=01/2015, Dimensions=0.44x0.039x0.022(2x1x0.55)LxWxHin.(mm), Manufacturer URL=http://www.bourns.com/, Mounting Technology=SurfaceMount, Mounting Type=SurfaceMount, Number of Terminals=8
SW200: library part CMP-2100-03586-2, "SWITCH TACTILE SPST-NO 0.05A 12V", Contact Current Rating=50mA, Contact Resistance=100mR, Insulation Resistance=100MR, Max Operating Temperature=70°C, Max Voltage Rating (DC)=12V, Min Operating Temperature=-25°C, Operating Force=1.5N, Package Quantity=1, Ratings="Dust Proof", Actuator Length=0.4mm, Actuator Type=Standard, Contact Material=Silver, Current Rating=50mA, Depth=2.5mm, Electrical Life=200000Cycles, Height=1.2mm, Illumination Type=Non-Illuminated, Lead Free="Lead Free", Length=4mm, Max Current Rating=50mA, Mechanical Life=200000Cycles, Mount="Surface Mount", Orientation=Straight, Packaging="Tape and Reel", Switch Function=Off-Mom, Switch Travel=0.15mm, Termination=SMD/SMT, Throw Configuration=SPST, Voltage Rating (DC)=12V, Weight=0.000776oz, Width=3mm
U100: library part CMP-209535-000001-1, "LDO Voltage Regulators 1A, 3.3V", Dropout Voltage=1.1V, Manufacturer="Advanced Monolithic Systems", Max Junction Temp=+125°C, Max Power Dissipation=1.2W, Max Supply Voltage=15V, Nominal Supply Current=5mA, Output Current=1A, Output Voltage=3.3V, Package=AMS1117, Temperature="-40°C to +125°C", Temperature Range Low=-40°C, Automotive=No, Category=IC, ComponentLink2Description=Datasheet, ComponentLink2URL=http://www.advanced-monolithic.com/pdf/ds1117.pdf, Device Class L1="Integrated Circuits (ICs)", Device Class L2="Power Management ICs", Device Class L3="Voltage Regulators - Linear", Height=1.8mm, Ipc Land Pattern Name=SOT229P700X180-4, Lead Free=Yes, Manufacturer Part Number=AMS1117-3.3, Number Of Outputs=1, Octopart=https://octopart.com/ams1117-3.3-advanced+monolithic+systems-25899300, Output Type=Fixed, RoHS=TRUE, Standoff Height=0.64mm, Temperature Range High=+125°C
U200: library part CMP-0537-00011-1, "ARM Cortex-M4 32-bit MCU, 64 KB Flash, 16 KB Internal RAM, 37 I/Os, 48-Pin LQFP, -40 to 85 degC, Tray", I/Os (High Current)=37, Operating Frequency(F) (Processor speed) (MHz)=72, Package Description="48-Pin Low Profile Quad Flat Package, Body 7 x 7 mm, Pitch 0.5 mm", Package Reference=LQFP48, Supply Voltage(Vcc) min (V)=2, ComponentLink1Description="Manufacturer URL", ComponentLink1URL=http://www.st.com/, ComponentLink2Description=Datasheet, ComponentLink2URL=http://www.st.com/st-web-ui/static/active/en/resource/technical/document/datasheet/DM00093333.pdf, Core="ARM Cortex-M4", D/A Converter=1, DatasheetVersion="Rev. 5", FLASH Size (Prog) (kB)=64, Internal RAM Size (kB)=16, Mounting Technology="Surface Mount", Packing=Tray
U300: library part CMP-1753-00002-2, "3-Axis Gyroscope, Accelerometer and a Digital Motion Processor(TM) (DMP), 2.375 to 3.46 V, -40 to 85 degC, 24-Pin QFN, RoHS, Tape and Reel", Manufacturer=InvenSense, Standard Package=5,000, Category=Sensors,Transducers, Datasheet URL=http://datasheet.octopart.com/MPU-6050-InvenSense-datasheet-14421344.pdf, Datasheet Version="Rev. 3.3, 05/2012", Dynamic Catalog=MPU-6000™Series, Family=Multifunction, Featured Product=MPU-60506-Axis,IntegratedI²CSolution, Manufacturer URL=http://www.invensense.com/, Online Catalog=MPU-6000™Series, Other Names="1428-1007-2 / MPU6050", Output Type=Digital, Sensor Type=MotionTracking, Unit PriceUSD=Digital
Y200: library part CMP-06054-000001-1, "CERAMIC RES 16.0000MHZ 15PF SMD", Frequency=16MHz, Load Capacitance=15pF, Manufacturer=Murata, Package=0, Temperature="-40°C to +85°C", Temperature Range High=+85°C, Temperature Range Low=-40°C, Tolerance=0.5%, Automotive=No, Category=Crys, ComponentLink2Description=Datasheet, ComponentLink2URL=https://www.murata.com/en-sg/products/productdata/8801162231838/SPEC-CSTNE16M0V530000R0.pdf?1545967809000, Device Class L1="Passive Components", Device Class L2="Crystals / Oscillators", Device Class L3=Crystals, Digikey Description="CERAMIC RES 16.0000MHZ 15PF SMD", Esr=40Ω, Height=1mm, Lead Free=Yes, Manufacturer Part Number=CSTNE16M0V530000R0, Mouser Description="Ceramic Resonator 16MHz ±0.5% (Tol) ±0.3% (Stability) 15pF 40Ohm 3-Pin CSMD T/R", Octopart=https://octopart.com/cstne16m0v530000r0-murata-91406924, RoHS=TRUE, Series=CSTNE_V, Stability=0.3%

## Free pads (board coordinates)
  rrect50% 1x1.5 smd far side: 1(109.957,80.01) 2(111.1,80.01) 3(112.253,80.01) 4(113.411,80.01) 5(112.319,61.5) 6(113.487,61.5) 7(114.656,61.5) 8(115.824,61.5) 9(116.992,61.5) 10(118.161,61.5) 11(119.329,61.5)
  round 1.524 hole 3 unplated: 7(142,85) 8(94,85) 9(142,52) 10(94,52)
  round 1.152 hole 1.152 unplated: TH(97,52) TH(142,82)

## Via types
v1: diameter 0.8, hole 0.4, Top Layer to Bottom Layer, 79 vias
v2: diameter 0.51, hole 0.2, Top Layer to Bottom Layer, 22 vias
v3: diameter 0.5, hole 0.2, Top Layer to Bottom Layer, 17 vias

## Nets (pads, with @x,y where several pads share a name; then routed paths per layer and width w, separated by ;. In a path a pad name is that pad's centre, name@x,y a point inside that pad or via, vN(x,y) a via of type N, cw(c..) or ccw(c..) an arc to the next point about the centre after c; other vN are vias at no path point)
+3V3: C102.1 C201.1 C202.2 C203.2 C204.2 C205.2 C206.2 C300.1 C303.2 D201.2 DS100.1 P200.2 P200.4 P201.1 P202.4 R200.2 R201.2 R202.2 R203.2 SW200.2 U100.2 U100.4 U200.1 U200.9 U200.24 U200.36 U200.48 U300.8 U300.13 | length 55.2
  Top Layer w0.2: C202.2 105.119,68.38 cw(c107.659,68.38) 105.863,70.176 106.299,70.612 cw(c106.347,70.564) 106.347,70.632 U200.9 ; D201.2 cw(c109.418,55.062) 110.363,55.062 110.363,52.07 ccw(c111.633,52.07) P200.4 ; C303.2 cw(c129.461,84.099) 129.986,84.099 U300.13 ; U300.8 131.036,79.785 131.053,79.785 131.081,79.785 131.137,79.785 cw(c131.136,79.485) 131.436,79.485 131.445,78.74 ccw(c132.512,79.807) 132.512,78.298 C300.1
  Top Layer w0.3: C206.2 cw(c105.805,74.824) 107.435,74.824 U200.1 ; C203.2 108.241,78.607 ccw(c109.849,78.607) 108.712,77.47 cw(c107.993,76.751) 109.01,76.751 U200.48 ; U200.24 114.51,66.045 ccw(c114.972,66.045) C204.2 ; U200.36 117.682,74.632 ccw(c117.682,75.649) C205.2
  Top Layer w0.5: C201.1 105.094,66.573 105.094,68.174 C202.2 ; v1(120.142,58.801) R203.2 ; R202.2 v1(128.27,58.801) ; DS100.1 134.003,53.448 ccw(c132.207,55.244) 134.747,55.244 U100.4 ccw(c134.86,56.508) 134.86,56.348 C102.1
  Top Layer w0.75: R200.2@122.063,77.375 R200.2 R201.2
  Top Layer w1: C206.2 ccw(c105.805,77.329) 106.68,77.329 v1(106.68,78.613) C203.2 ; v1(113.665,65.481) cw(c113.767,65.481) 113.767,65.583 C204.2 ; v1(114.173,83.058) SW200.2 ; C205.2 cw(c120.637,74.93) 119.056,76.511 119.535,76.99 cw(c120.464,76.061) v1(120.464,77.375) R200.2@122.063,77.375 ; C303.2 129.461,85.217 v1(131.318,85.217) ; C300.1 133.653,77.445 v1(133.934,77.445)
  other v1: 132.2,58.7 134.8,58.7 137.3,58.7 132.2,60.7 134.8,60.7 137.3,60.7 106.426,66.548
+5V: C101.1 FB100.2 U100.3 | length 3.5
  Top Layer w0.75: C101.1 131.968,64.77 132.055,64.857 FB100.2 132.08,63.529 132.457,63.152 U100.3
GND: C100.2 C101.2 C102.2 C200.1 C201.2 C202.1 C203.1 C204.1 C205.1 C206.1 C300.2 C301.2 C302.1 C303.1 D100.1 D101.1 D102.1 D201.1 D202.1 D203.1 D204.1 D205.1 D206.1 D207.1 D208.1 D209.1 D210.1 D211.1 D212.1 D213.1 D214.1 D215.1 J100.A1 J100.A12 J100.B1 J100.B12 P200.8 P200.10 P201.2 P202.1 R100.2 R101.2 R102.2 R204.2 R205.1 U100.1 U200.8 U200.23 U200.35 U200.47 U300.1 U300.9 U300.11 U300.18 U300.25 Y200.2 | length 28.8
  Top Layer w0.2: U300.1 127.486,79.26 128.186,79.96 v3(128.186,80.01) ; U300.18 127.486,81.86 128.186,81.16 v3(128.186,81.11) ; v3(129.286,80.01) 129.586,80.31 U300.9 132.238,80.31 132.75,79.798 C300.2 ; v3(129.286,81.11) 129.486,81.31 U300.11 131.602,81.31 131.775,81.483 131.775,81.834 132.75,82.809 C302.1
  Top Layer w0.3: D208.1 D209.1 D210.1 D211.1 ; v1(100.457,58.547) D214.1 ; v1(102.235,58.547) D213.1 ; U200.47 109.51,78.176 cw(c110.128,78.176) C203.1 ; U200.35 117.62,74.132 cw(c117.619,73.832) 117.76,74.097 ccw(c117.926,74.405) 117.926,74.055 118.876,74.055 ccw(c118.876,74.405) 119.131,74.166 119.505,74.563 cw(c119.722,74.356) 119.526,74.583 C205.1 ; J100.A1 136.838,67.104 136.938,67.004 J100.B12 ; J100.A12 137.638,73.104 J100.B1
  other v1: 99,51 102,51 117,51 120,51 123,51 126,51 129,51 132,51 138,51 97.5,54 100.5,54 118.5,54 130.5,54 139.5,54 93,57 117,57 120,57 129,57 141,57.6 104.191,58.191 97.409,59.69 112.5,60 115.5,60 118.5,60 139.5,60 142.5,60 120,63 141,63 97.409,63.271 128,64.7 118.5,66 139.5,66 128.041,66.573 126,69 109.5,72 124.5,72 127.5,72 133.5,72 102,72.517 138.862,73.177 102,75 123,75 129,75 135,75 100.5,78 103.5,78 139.5,78 142.5,78 93,81 96,81 99,81 102,81 105,81 108,81 117,81 141,81 118.5,84 133.5,84 139.5,84 125.654,84.811
  other v2: 138.684,68.072 134.264,69.215 134.264,70.993 139.319,71.425
IMU_CP: C301.1 U300.20 | length 1.9
  Top Layer w0.2: C301.1 ccw(c125.472,82.082) 125.472,81.31 U300.20
IMU_INT: U200.18 U300.12 | length 38.7
  Top Layer w0.2: U200.18 111.51,65.503 ccw(c113.868,65.503) 113.868,63.144 117.373,63.144 ccw(c117.373,65.151) v2(119.38,65.151) ; U300.12 131.086,81.81 ccw(c131.086,82.042) 131.318,82.042 v2(131.318,83.947)
  Bottom Layer w0.2: v2(119.38,65.151) 119.38,68.036 cw(c121.92,68.036) 120.124,69.832 131.064,80.772 ccw(c130.451,81.385) 131.318,81.385 v2(131.318,83.947)
IMU_REG: C302.2 U300.10 | length 2.2
  Top Layer w0.2: U300.10 131.475,80.81 ccw(c131.475,82.684) C302.2
MCU_BOOT0: R205.2 SW200.1 U200.44 | length 8.6
  Top Layer w0.3: U200.44 111.01,78.432 cw(c112.703,78.432) 111.506,79.629 ccw(c111.199,79.936) 111.633,79.936 R205.2
  Top Layer w0.5: R205.2 112.098,81.746 cw(c112.098,79.206) 113.894,81.002 SW200.1
MCU_I2C1_SCL: R200.1 U200.42 U300.23 | length 17.4
  Top Layer w0.2: R200.1 122.276,79.451 122.634,79.81 U300.23
  Top Layer w0.3: U200.42 112.01,76.882 cw(c112.51,76.882) 112.013,76.933 ccw(c111.714,76.962) 112.014,76.961 112.014,77.114 cw(c113.737,77.114) 113.737,78.838 R200.1
MCU_I2C1_SDA: R201.1 U200.43 U300.24 | length 21.2
  Top Layer w0.2: R201.1@123.803,78.835 125.324,78.835 ; v3(125.324,78.08) 125.324,78.835 ; U300.24 126.771,79.3 126.771,79.045 126.561,78.835 125.324,78.835
  Top Layer w0.3: U200.43 111.51,74.484 ccw(c111.67,74.484) v3(111.557,74.371)
  Bottom Layer w0.3: v3(111.557,74.371) 111.595,74.409 112.179,74.409 113.716,75.946 123.19,75.946 v3(125.324,78.08)
MCU_I2C2_SCL: D207.2 P202.3 R202.1 U200.31 | length 26.3
  Top Layer w0.3: U200.31 119.856,72.132 cw(c119.856,69.592) 121.652,71.388 125.123,67.917 cw(c123.327,66.121) 125.867,66.121 R202.1 cw(c125.143,58.077) 126.167,58.077 D207.2 ccw(c127.874,55.316) 125.46,55.316 P202.3
MCU_I2C2_SDA: D206.2 P202.2 R203.1 U200.30 | length 23.6
  Top Layer w0.3: U200.30 116.76,71.632 cw(c116.76,71.132) 116.823,71.628 ccw(c116.858,71.926) 116.837,71.627 cw(c116.673,69.092) 118.469,70.888 123.208,66.149 cw(c121.412,64.353) 123.952,64.353 123.952,61.006 cw(c121.412,61.006) 123.208,59.21 123.004,59.006 ccw(c124.222,57.787) 122.499,57.787 D206.2 122.716,56.806 cw(c120.92,55.01) 123.46,55.01 P202.2
MCU_LED_PIN: D200.2 U200.28 | length 10.6
  Top Layer w0.3: U200.28 116.76,70.632 cw(c116.76,70.132) 116.872,70.619 ccw(c116.938,70.912) 116.937,70.612 117.348,70.612 cw(c117.348,70.231) 117.729,70.231 117.729,69.215 ccw(c118.955,69.215) 118.088,68.348 120.68,65.756 cw(c118.884,63.96) 121.424,63.96 D200.2
MCU_NRST: C200.2 R206.4 U200.7 | length 24.9
  Top Layer w0.2: v2(101.6,69.469) 104.14,69.469 ccw(c104.14,70.082) 104.574,69.649 105.664,70.739 106.447,71.456 ccw(c106.313,71.604) 106.45,71.458 cw(c106.76,71.132) 106.76,71.582 106.808,71.582 ccw(c106.807,71.782) 106.854,71.587 106.854,71.632 U200.7
  Top Layer w0.3: C200.2 v2(101.6,69.469) ; v2(107.442,58.547) 108.343,58.547 R206.4
  Bottom Layer w0.3: v2(101.6,69.469) 105.885,69.469 ; 105.887,69.469 cw(c105.887,68.168) 106.807,69.088 cw(c105.274,67.555) 107.442,67.555 ; v2(107.442,58.547) 107.442,67.554
MCU_OSC_IN: U200.5 Y200.3 | length 3.6
  Top Layer w0.3: Y200.3 105.15,74.225 cw(c105.15,73.228) 106.147,73.228 ccw(c106.743,73.228) 106.743,72.632 U200.5
MCU_OSC_OUT: U200.6 Y200.1 | length 2.9
  Top Layer w0.3: Y200.1 105.988,71.825 ccw(c105.988,71.958) 106.121,71.958 cw(c106.295,71.958) 106.295,72.132 U200.6
MCU_PA0: R207.4 U200.10 | length 8
  Top Layer w0.2: U200.10 106.962,70.132 ccw(c106.962,69.037) 105.867,69.051 ccw(c106.067,69.049) 105.869,69.023 105.969,68.199 ccw(c106.477,68.199) 106.477,67.691 106.999,67.691 cw(c106.999,67.104) 107.586,67.104 R207.4
MCU_PA1: R207.3 U200.11 | length 8.3
  Top Layer w0.2: U200.11 106.843,69.632 ccw(c106.843,69.063) 106.274,69.063 ccw(c107.036,69.063) 107.036,68.301 107.417,68.301 cw(c107.417,67.532) 108.151,67.757 cw(c107.96,67.699) 108.16,67.7 108.16,66.882 ccw(c109.01,66.882) 108.18,66.697 cw(c107.985,66.654) 108.185,66.654 108.204,64.519 cw(c108.004,64.516) 108.204,64.517 ; R207.3 R207.3@107.786,63.911 ; R207.3@107.787,63.911 ccw(c107.586,64.495) 107.824,63.925 cw(c107.9,63.74) 107.894,63.94 ccw(c107.886,64.24) 108.186,64.24 108.186,64.325 cw(c108.386,64.324) 108.19,64.365 ccw(c107.586,64.495) 108.204,64.495 108.204,64.516
MCU_PA2: R207.2 U200.12 | length 7
  Top Layer w0.2: U200.12 cw(c107.435,67.982) 108.555,68.242 cw(c108.36,68.198) 108.56,68.2 108.56,66.882 ccw(c109.01,66.882) 108.577,66.758 cw(c108.385,66.704) 108.585,66.706 108.604,64.52 cw(c108.204,64.516) 108.604,64.516 108.604,64.495 cw(c107.586,64.495) 108.601,64.42 108.584,64.188 cw(c107.886,64.24) 108.306,63.68 108.066,63.499 cw(c107.886,63.739) 108.06,63.495 cw(c107.886,63.739) 107.963,63.45 ccw(c108.015,63.257) 107.945,63.444 cw(c107.586,64.376) 107.787,63.398 107.786,63.398 R207.2
MCU_PA3: R207.1 U200.13 | length 5.5
  Top Layer w0.2: R207.1 ccw(c107.586,64.301) 109.01,64.301 U200.13
MCU_PA4: R208.4 U200.14 | length 6.8
  Top Layer w0.2: R208.4 ccw(c107.586,63.761) 109.51,63.761 U200.14
MCU_PA5: R208.3 U200.15 | length 7.6
  Top Layer w0.2: R208.3 ccw(c107.586,63.761) 110.01,63.761 U200.15
MCU_PA6: R208.2 U200.16 | length 8.6
  Top Layer w0.2: R208.2 107.97,60.837 ccw(c107.97,63.377) 110.51,63.377 U200.16
MCU_PA7: R208.1 U200.17 | length 9.6
  Top Layer w0.2: R208.1 108.47,60.337 ccw(c108.47,62.877) 111.01,62.877 U200.17
MCU_PB1: pad.6 U200.19 | length 8.4
  Top Layer w0.2: U200.19 112.01,65.308 ccw(c113.868,65.308) 112.232,64.429 ccw(c112.406,64.526) 112.239,64.416 ccw(c113.868,65.503) 113.868,63.544 113.875,63.544 ccw(c113.875,64.433) v3(114.503,63.805)
  Bottom Layer w0.2: pad.6 113.487,61.737 cw(c116.027,61.737) 114.231,63.533 v3(114.503,63.805)
MCU_PB2: pad.5 U200.20 | length 7.2
  Top Layer w0.2: U200.20 112.51,65.417 ccw(c113.69,65.417) v3(113.69,64.237)
  Bottom Layer w0.2: pad.5 112.319,61.813 cw(c114.859,61.813) 113.063,63.609 v3(113.69,64.237)
MCU_PB4: pad.4 U200.40 | length 8
  Top Layer w0.2: U200.40 113.01,76.866 cw(c113.538,76.866) 113.538,77.394 115.545,77.394 ccw(c115.545,77.495) v3(115.646,77.495)
  Bottom Layer w0.2: pad.4 113.436,80.035 114.91,80.035 115.646,79.299 v3(115.646,77.495)
MCU_PB5: pad.3 U200.41 | length 7.4
  Top Layer w0.2: U200.41 112.51,76.95 cw(c113.665,76.95) 113.665,78.105 114.579,78.105 cw(c114.579,78.08) v3(114.605,78.08)
  Bottom Layer w0.2: pad.3 112.253,78.704 112.878,78.08 v3(114.605,78.08)
MCU_PB8: pad.2 U200.45 | length 7.4
  Top Layer w0.2: v3(110.236,81.483) cw(c110.236,81.209) 110.51,81.209 U200.45
  Bottom Layer w0.2: v3(110.236,81.483) cw(c110.236,80.62) 111.1,80.62 pad.2
MCU_PB9: pad.1 U200.46 | length 8.2
  Top Layer w0.2: U200.46 110.01,74.877 ccw(c110.541,74.877) v3(110.541,74.346)
  Bottom Layer w0.2: pad.1 109.957,74.93 ccw(c110.541,74.93) v3(110.541,74.346)
MCU_PB10: pad.7@114.656,61.5 U200.21 | length 10.6
  Top Layer w0.2: v3(112.725,69.215) cw(c112.725,68.93) 113.01,68.93 U200.21
  Bottom Layer w0.2: v3(112.725,69.215) 112.725,68.593 ccw(c114.72,68.593) 113.309,67.183 114.629,65.863 cw(c113.155,64.389) 115.24,64.389 115.24,63.654 cw(c114.806,63.654) 115.113,63.348 ccw(c116.217,62.244) 114.656,62.244 pad.7@114.656,61.5
MCU_PB11: pad.8@115.824,61.5 U200.22 | length 11.9
  Top Layer w0.2: v3(113.411,70.028) cw(c113.411,69.929) 113.51,69.929 U200.22
  Bottom Layer w0.2: v3(113.411,70.028) 113.411,68.792 ccw(c115.579,68.792) 114.046,67.259 115.08,66.225 cw(c113.284,64.429) 115.824,64.429 pad.8@115.824,61.5
MCU_PB12: pad.9@116.992,61.5 U200.25 | length 10.3
  Top Layer w0.2: v3(114.402,69.24) ccw(c114.51,69.24) 114.51,69.132 U200.25
  Bottom Layer w0.2: v3(114.402,69.24) 114.402,68.26 ccw(c115.529,68.26) 114.732,67.462 115.74,66.454 cw(c113.944,64.658) 116.484,64.658 116.484,63.178 ccw(c117.178,63.178) 116.688,62.687 cw(c115.952,61.951) 116.992,61.951 pad.9@116.992,61.5
MCU_PB13: pad.10@118.161,61.5 U200.26 | length 11.9
  Top Layer w0.2: v3(114.3,70.079) ccw(c114.747,70.079) 114.306,70.003 ccw(c114.503,70.038) 114.477,69.84 cw(c114.402,69.24) 114.811,69.684 ccw(c114.946,69.832) 114.945,69.632 U200.26
  Bottom Layer w0.2: v3(114.3,70.079) cw(c114.3,69.527) 114.69,69.917 115.164,69.444 115.164,68.743 ccw(c116.906,68.743) 115.674,67.511 115.74,67.444 cw(c115.599,67.303) 115.754,67.429 116.096,67.007 ; 116.097,67.006 116.103,66.999 cw(c113.525,64.422) 117.17,64.422 ; 117.17,64.421 117.17,63.78 ccw(c118.644,63.78) 117.602,62.738 117.681,62.659 cw(c116.521,61.5) pad.10@118.161,61.5
MCU_PB14: pad.11 U200.27 | length 13.2
  Top Layer w0.2: v3(114.402,70.993) ccw(c115.263,70.993) 114.434,70.757 ccw(c114.626,70.813) 114.544,70.631 cw(c114.3,70.079) 114.864,70.294 ccw(c115.051,70.367) 114.985,70.178 ccw(c115.263,70.993) 115.263,70.132 U200.27
  Bottom Layer w0.2: v3(114.402,70.993) 115.875,69.519 115.875,68.935 117.7,65.499 119.253,62.898 ccw(c120,63) 119.284,62.764 cw(c119.094,62.702) 119.29,62.738 cw(c116.789,62.295) 119.329,62.295 pad.11
MCU_SWCLK: R206.2 U200.37 | length 19.6
  Top Layer w0.2: v2(114.3,73.914) ccw(c113.793,74.421) 114.51,74.421 U200.37
  Top Layer w0.3: R206.2 R206.2 cw(c109.843,58.564) 109.343,58.586 109.355,58.851 ccw(c109.055,58.864) 109.356,58.864 cw(c109.706,58.864) 109.557,59.181 ccw(c109.428,59.452) 109.728,59.451 v2(109.728,59.563)
  Bottom Layer w0.3: v2(109.728,59.563) 109.728,68.29 cw(c112.268,68.29) 110.472,70.086 v2(114.3,73.914)
MCU_SWDIO: R206.1 U200.34 | length 30.7
  Top Layer w0.2: U200.34 116.76,73.632 117.909,73.605 ccw(c117.926,74.405) 117.926,73.605 118.876,73.605 ccw(c118.876,74.405) 118.884,73.605 121.255,73.632 cw(c121.257,73.432) 121.257,73.632 ccw(c121.257,74.422) v2(122.047,74.422)
  Top Layer w0.3: R206.1 110.744,58.564 v2(110.744,58.547)
  Bottom Layer w0.3: v2(110.744,58.547) 110.744,67.401 cw(c113.284,67.401) 111.488,69.197 114.953,72.662 cw(c116.749,70.866) 116.749,73.406 119.979,73.406 ccw(c119.979,75.946) 121.775,74.15 v2(122.047,74.422)
MCU_TRACESWO: R206.3 U200.39 | length 19.6
  Top Layer w0.2: v2(112.903,73.914) ccw(c111.438,75.379) 113.51,75.379 U200.39
  Top Layer w0.3: v2(108.585,59.563) 108.585,59.372 ccw(c108.885,59.373) 108.698,59.139 cw(c108.48,58.864) 108.83,58.864 108.83,58.704 ccw(c109.13,58.705) 108.835,58.653 cw(c108.343,58.564) R206.3 R206.3
  Bottom Layer w0.3: v2(108.585,59.563) 108.585,68.544 cw(c111.125,68.544) 109.329,70.34 v2(112.903,73.914)
NetD200_1: D200.1 R204.1 | length 2.1
  Top Layer w0.3: R204.1 ccw(c122.464,61.158) 122.924,61.158 D200.1
NetDS100_2: DS100.2 R100.1 | length 1.8
  Top Layer w0.5: DS100.2 135.703,51.98 cw(c135.703,51.895) R100.1
NRST: D205.2 P200.9 R206.5 | length 7.9
  Top Layer w0.2: P200.9 104.013,56.007 D205.2 cw(c105.535,56.007) 105.535,57.514 R206.5
PA0: D208.2 P201.3 R207.5 | length 16.8
  Top Layer w0.2: D208.2 98.679,64.008 cw(c99.568,64.008) v2(99.568,64.897) 100.352,64.897 ccw(c100.352,65.764) 100.965,65.151 105.762,65.151 cw(c105.762,64.377) R207.5
  Bottom Layer w0.2: P201.3 ccw(c98.552,68.961) 97.282,68.961 97.282,67.183 ccw(c99.568,67.183) v2(99.568,64.897)
PA1: D209.2 P201.5 R207.6 | length 17
  Top Layer w0.2: D209.2 100.457,63.627 cw(c101.346,63.627) v2(101.346,64.516) 101.419,64.516 101.597,64.694 104.978,64.694 105.271,64.401 ccw(c106.536,65.666) R207.6
  Bottom Layer w0.2: P201.5 cw(c98.552,71.374) 99.949,71.374 99.949,68.072 ccw(c100.457,68.072) 100.457,67.564 cw(c100.457,66.675) 101.346,66.675 v2(101.346,64.516)
PA2: D210.2 P201.7 R207.7 | length 19.1
  Top Layer w0.2: D210.2 102.235,63.73 102.564,64.059 v2(103.124,64.059) 103.197,64.059 103.349,64.211 104.572,64.211 104.662,64.121 ccw(c106.458,65.917) 106.458,63.377 R207.7
  Bottom Layer w0.2: P201.7 cw(c98.552,73.406) 100.457,73.406 100.457,69.342 ccw(c101.727,69.342) 101.727,68.072 102.235,68.072 cw(c102.235,67.183) 103.124,67.183 v2(103.124,64.059)
PA3: D211.2 P201.9 R207.8 | length 22.3
  Top Layer w0.2: D211.2@103.863,63.419 104.163,63.419 v2(105.41,62.865) 106.336,62.865 R207.8
  Bottom Layer w0.2: P201.9 98.679,77.851 cw(c98.679,75.565) 100.965,75.565 100.965,69.469 ccw(c101.854,69.469) 101.854,68.58 103.124,68.58 cw(c103.124,66.294) 105.41,66.294 v2(105.41,62.865)
PA4: D215.2 P201.4 R208.5 | length 21.9
  Top Layer w0.2: P201.4 ccw(c96.012,68.707) 94.488,68.707 94.488,64.77 ccw(c97.028,64.77) 97.028,62.23 98.679,62.23 ; D215.2 98.679,62.23 ; R208.5 105.803,61.837 cw(c105.803,62.103) 105.537,62.103 ccw(c105.41,62.103) 105.41,62.23 98.679,62.23
PA5: D214.2 P201.6 R208.6 | length 29.8
  Top Layer w0.2: P201.6 ccw(c96.012,70.739) 93.98,70.739 93.98,60.706 ccw(c96.52,60.706) 96.52,58.166 98.552,58.166 ccw(c98.552,59.182) 99.568,59.182 99.568,59.817 cw(c100.147,59.817) 100.147,60.396 D214.2 100.457,60.452 cw(c101.727,60.452) 101.727,61.722 105.029,61.722 cw(c105.029,61.468) 105.283,61.468 ccw(c105.414,61.468) 105.414,61.337 R208.6
PA6: D213.2 P201.8 R208.7 | length 34
  Top Layer w0.2: P201.8 ccw(c96.012,72.771) 93.472,72.771 93.472,60.198 ccw(c96.012,60.198) 96.012,57.658 100.584,57.658 ccw(c100.584,58.42) 101.346,58.42 101.346,59.817 cw(c101.925,59.817) 101.925,60.396 D213.2 cw(c103.126,60.396) 103.126,61.287 104.702,61.287 cw(c104.702,61.087) 104.902,61.087 ccw(c105.152,61.087) 105.152,60.837 R208.7
PA7: D212.2 P201.10 R208.8 | length 37.5
  Top Layer w0.2: P201.10 95.504,77.851 ccw(c95.504,75.311) 92.964,75.311 92.964,59.69 ccw(c95.504,59.69) 95.504,57.15 101.6,57.15 ccw(c101.6,58.674) 103.124,58.674 103.124,59.817 cw(c103.703,59.817) 103.703,60.396 D212.2 106.477,60.396 cw(c106.477,60.337) R208.8
SWCLK: D203.2 P200.3 R206.7 | length 5.9
  Top Layer w0.2: R206.7 R206.7@109.377,57.314 ; R206.7@109.377,57.313 ccw(c109.961,57.514) 109.391,57.276 cw(c109.206,57.2) 109.406,57.206 ccw(c109.706,57.214) 109.706,56.914 109.791,56.914 cw(c109.79,56.714) 109.831,56.91 ccw(c109.961,57.514) 109.961,56.896 110.673,56.896 cw(c110.673,56.007) D203.2 111.562,53.411 ccw(c111.633,53.411) P200.3
SWDIO: D202.2 P200.1 R206.8 | length 7.8
  Top Layer w0.2: R206.8 112.595,57.514 cw(c112.595,56.007) D202.2 cw(c114.102,55.936) 114.173,55.936 P200.1
TRACESWO: D204.2 P200.7 R206.6 | length 5.9
  Top Layer w0.2: P200.7 ccw(c106.553,53.411) 106.624,53.411 D204.2 cw(c107.513,56.007) 107.513,56.896 108.225,56.896 ccw(c108.225,57.514) 108.355,56.91 cw(c108.396,56.714) 108.395,56.914 108.48,56.914 ccw(c108.48,57.214) 108.78,57.207 cw(c108.98,57.2) 108.795,57.276 ccw(c108.225,57.514) 108.81,57.314 R206.6
USB_CC1: J100.A5 R101.1 | length 14.6
  Top Layer w0.2: v1(133.756,68.123) 134.898,68.68 cw(c134.988,68.502) 134.951,68.699 cw(c134.975,68.568) 134.96,68.7 134.984,68.7 134.991,68.7 ccw(c135.049,69.412) 134.998,68.699 ccw(c135.049,69.412) 135.584,68.938 cw(c135.732,68.804) 135.624,68.972 cw(c136.074,68.269) 136.074,69.104 J100.A5 ; v1(134.29,65.507) ccw(c135.509,65.507) 135.509,64.287 138.278,64.287 cw(c138.278,63.297) 139.268,63.297 139.268,62.001 ccw(c139.929,62.001) 139.929,61.341 R101.1
  Bottom Layer w0.2: v1(133.756,68.123) v1(134.29,65.507)
USB_CC2: J100.B5 R102.1 | length 7.3
  Top Layer w0.2: J100.B5 137.738,70.866 138.303,70.866 ccw(c138.303,71.12) 138.557,71.12 138.557,71.577 cw(c139.243,71.577) 139.243,72.263 ccw(c139.243,72.72) 139.7,72.72 139.7,75.596 ccw(c138.944,75.596) R102.1
USB_CONN_D_N: D102.2 J100.A7 J100.B7 U200.33 | length 30.6
  Top Layer w0.089: J100.B7 138.299,69.854 v2(138.684,69.469)
  Top Layer w0.2: U200.33 116.104,73.113 116.85,73.113 116.854,73.109 121.639,73.109 124.417,70.331 129.931,70.331 130.048,70.448 ; D102.2 130.048,70.448 ; v2(135.128,70.866) 135.128,70.331 ; J100.A7 136.238,70.604 136.188,70.554 136.188,70.448 136.071,70.331 135.128,70.331 ; 130.048,70.448 130.165,70.331 135.128,70.331
  Bottom Layer w0.089: v2(135.128,70.866) 135.655,70.339 135.686,70.308 ccw(c135.807,70.429) 135.929,70.308 cw(c136.05,70.187) 136.172,70.307 136.236,70.243 ccw(c136.357,70.364) 136.357,70.193 136.854,70.193 cw(c136.854,70.021) 137.025,70.021 cw(c136.854,70.021) 136.854,69.85 136.182,69.85 ccw(c136.182,69.679) 136.011,69.679 ccw(c136.182,69.679) 136.182,69.507 137.913,69.507 ccw(c137.913,69.679) 138.084,69.679 cw(c138.256,69.679) 138.256,69.85 138.3,69.85 138.303,69.85 v2(138.684,69.469)
USB_CONN_D_P: D100.2 J100.A6 J100.B6 U200.32 | length 30.6
  Top Layer w0.089: J100.B6 138.998,70.354 139.205,70.561 v2(139.319,70.561)
  Top Layer w0.2: U200.32 116.104,72.651 116.85,72.651 116.854,72.655 121.45,72.655 124.228,69.877 129.931,69.877 130.048,69.76 ; D100.2 130.048,69.76 ; v2(135.128,69.342) 135.128,69.877 ; J100.A6 136.238,69.604 136.188,69.654 136.188,69.76 136.071,69.877 135.128,69.877 ; 130.048,69.76 130.165,69.877 135.128,69.877
  Bottom Layer w0.089: v2(135.128,69.342) 135.433,69.037 135.738,68.732 139.014,68.732 139.319,69.037 139.319,69.901 v2(139.319,70.561)
VBUS: C100.1 D101.2 FB100.1 J100.A4 J100.A9 J100.B4 J100.B9 | length 14.7
  Top Layer w0.2: FB100.1@132.405,66.507 D101.2 ; 137.088,69.453 137.088,69.254 137.088,69.203 ccw(c137.388,69.204) 137.088,69.189 137.112,68.719 ; 137.088,69.454 137.088,69.703 ; 137.088,69.704 137.088,70.504 ; 137.088,70.505 137.088,70.703 ; 137.088,70.704 137.088,71.004 cw(c137.388,71.004) 137.089,71.031 137.129,71.469
  Top Layer w0.3: FB100.1 132.105,66.207 FB100.1@132.405,66.507 ; 135.575,68.24 cw(c136.445,67.371) 135.632,68.293 135.943,68.604 136.067,68.604 136.362,68.604 J100.A4 136.877,68.604 ccw(c136.876,68.904) 137.112,68.719 cw(c137.388,68.504) 137.388,68.854 J100.B9 J100.B9@137.938,68.854 ; J100.A9 J100.A9@136.72,71.604 ; J100.A9@136.722,71.604 J100.A9@136.778,71.604 ; J100.A9@136.779,71.604 136.788,71.604 cw(c136.788,71.254) 136.928,71.575 ccw(c137.046,71.851) 136.955,71.565 136.999,71.551 cw(c136.909,71.265) 137.129,71.469 ccw(c137.388,71.704) 137.388,71.354 J100.B4
  Top Layer w0.5: FB100.1@132.105,66.207 133.542,66.207 135.575,68.24
  Top Layer w0.75: C100.1 ccw(c131.419,67.371) 131.419,66.207 FB100.1
pads on no net: J100.1 J100.2 J100.3 J100.4 J100.A2 J100.A3 J100.A8 J100.A10 J100.A11 J100.B2 J100.B3 J100.B8 J100.B10 J100.B11 P200.5 P200.6 U200.2 U200.3 U200.4 U200.29 U200.38 U300.2 U300.3 U300.4 U300.5 U300.6 U300.7 U300.14 U300.15 U300.16 U300.17 U300.19 U300.21 U300.22